# Altium PCB PCB3.PcbDoc
Units mil, origin at the board's own origin, x right, y up, seen from the top; angles counter-clockwise.
Board outline 8700 x 3665 mil, 2 copper layers (Top Layer, Bottom Layer); 67 components, 85 nets, 229 pads, 37 vias.
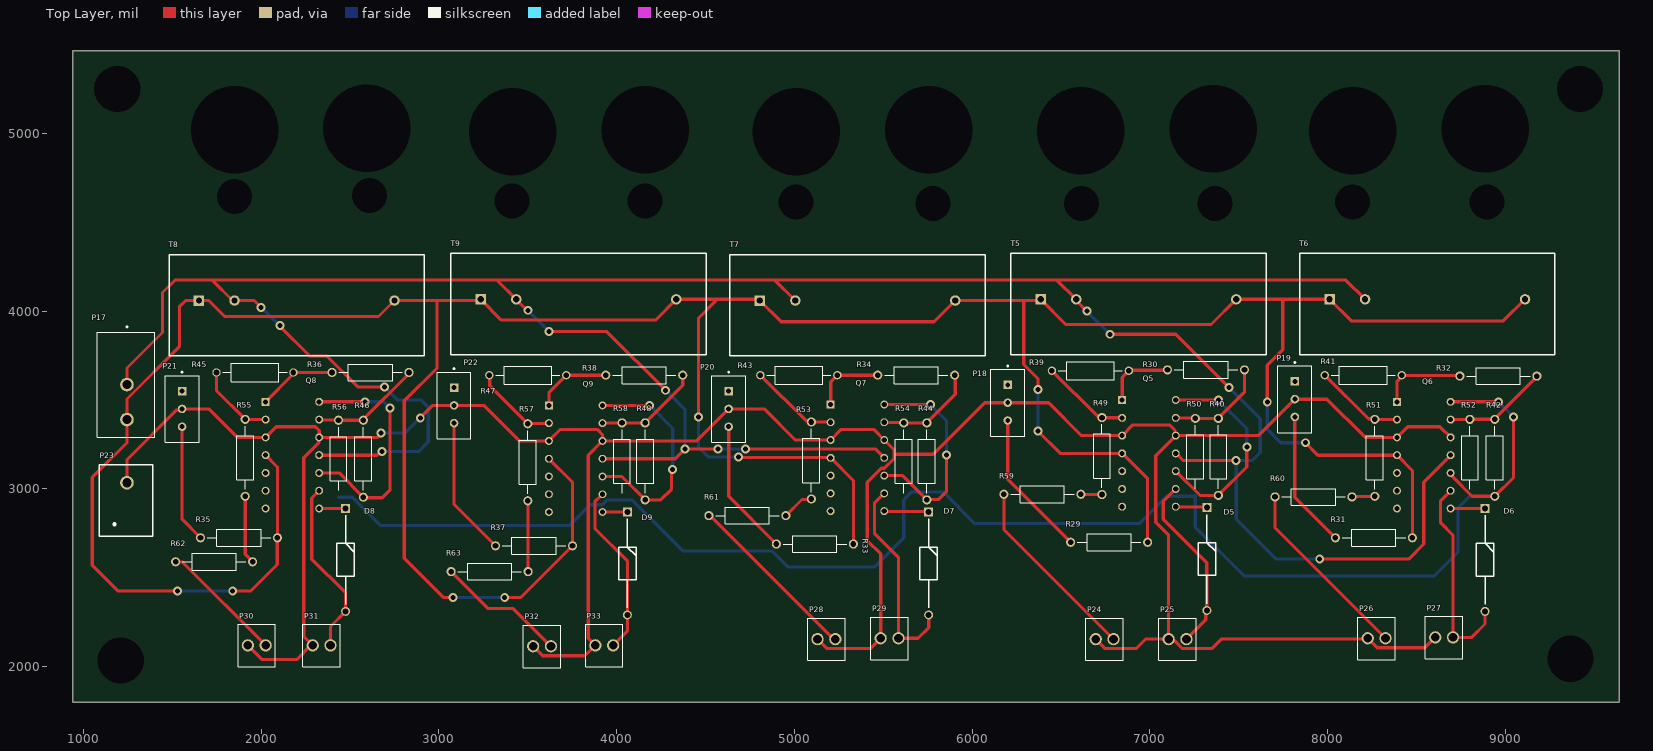
[diagram p0: Top Layer view]
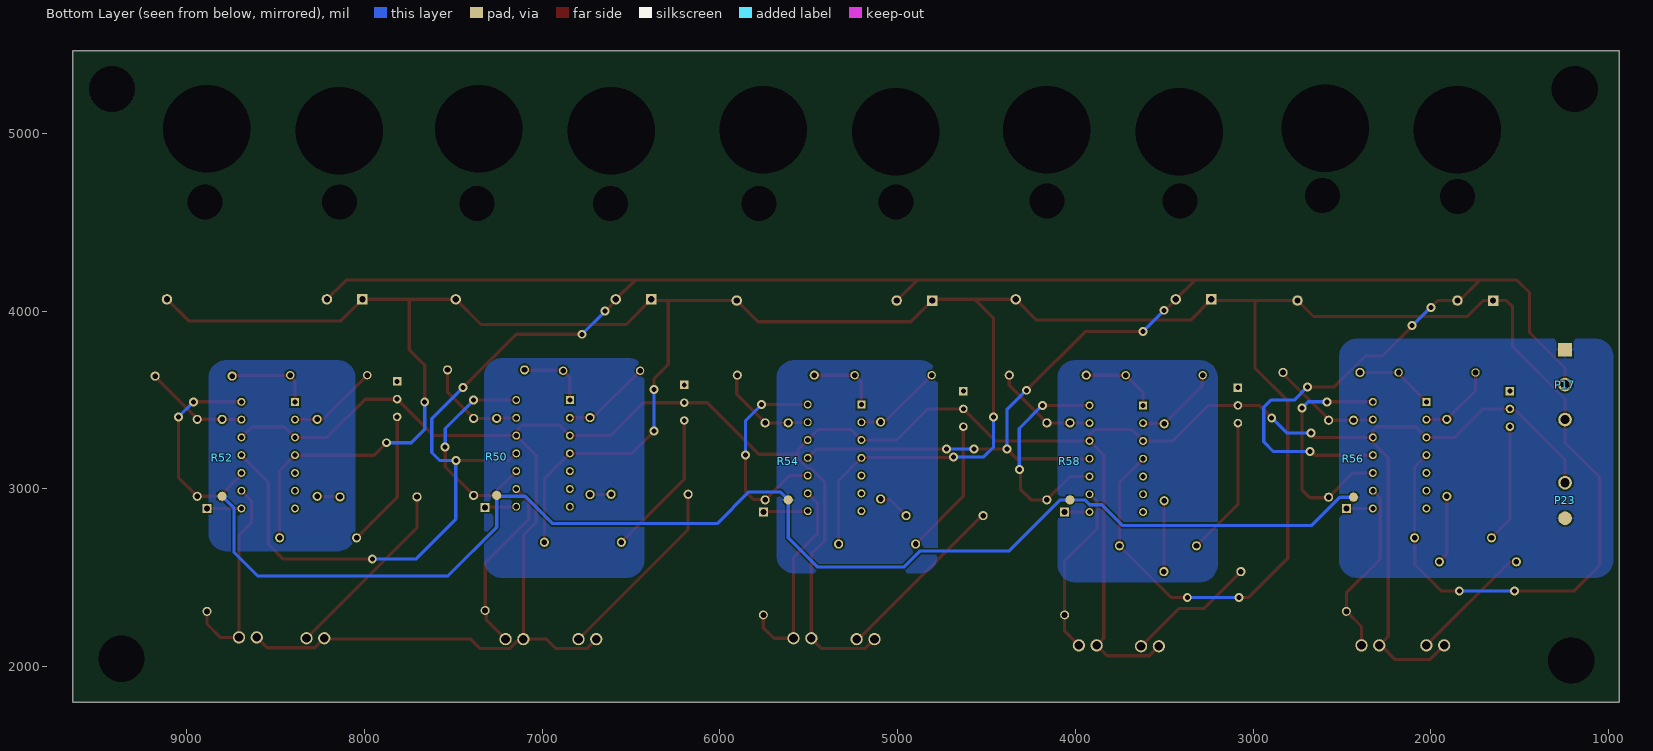
[diagram p1: Bottom Layer view, seen from below]
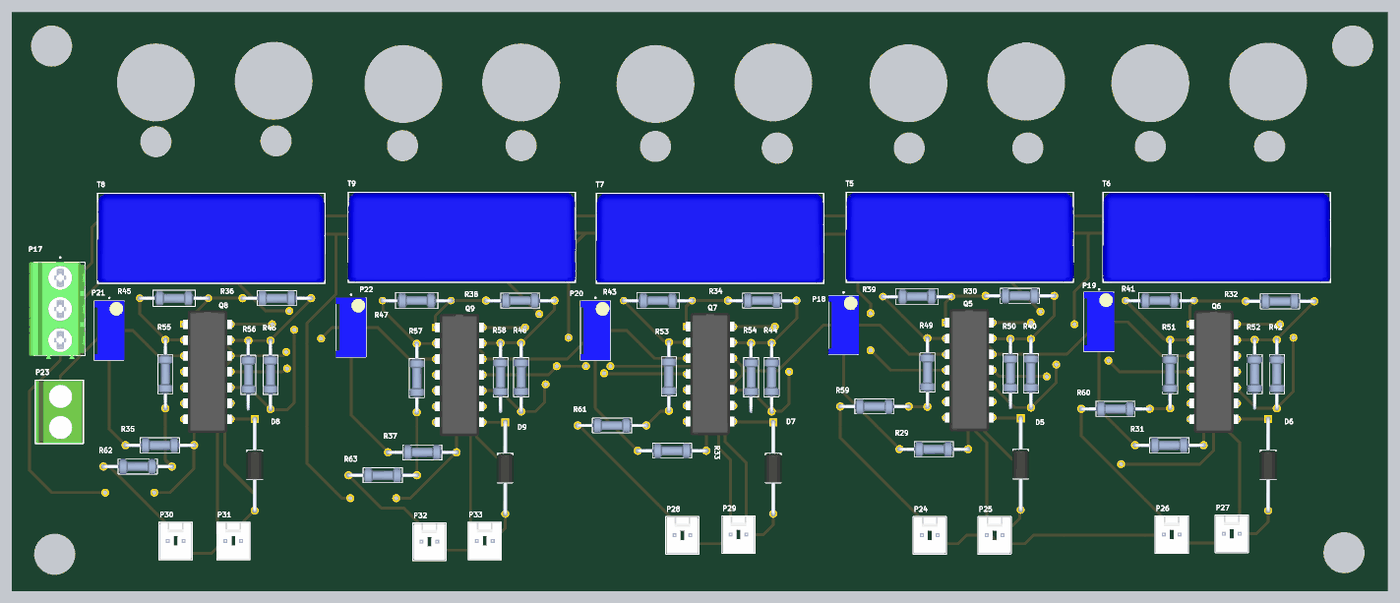
[diagram p2: 3D render of the assembled board from above, using the file's embedded part models]

## Layer stack, top to bottom
Top Solder: solder mask 0.4, Solder Resist, Dk 3.5
Top Layer: signal copper 1.4
Dielectric 1: dielectric 12.6, FR-4, Dk 4.8
Bottom Layer: signal copper 1.4
Bottom Solder: solder mask 0.4, Solder Resist, Dk 3.5

## Board outline
940,1800 9640,1800 9640,5465 940,5465

## Design rules (kind name [scope] priority, off if disabled: settings)
Clearance [All] p1: gap=10 ignorepadtopadclearanceinfootprint=FALSE
Height [All] p1: minheight=0 maxheight=1100 prefheight=500
HoleSize [All] p1: absolutevalues=TRUE maxlimit=500 minlimit=1 maxpercent=80.000 minpercent=20.000
PolygonConnect [All] p1: connectstyle=Relief reliefconductorwidth=10 reliefentries=4 polygonreliefangle="90 Angle" airgapwidth=10
RoutingVias [All] p1: holewidth=28 width=50 viastyle="Through Hole" minholewidth=28 minwidth=50 maxholewidth=28 maxwidth=50
SilkToSolderMaskClearance [IsPad] p1: minsilkscreentomaskgap=9 clearancetoexposedcopper=TRUE
SolderMaskExpansion [All] p1: expansion=0 istentingtop=FALSE
SupplyNets "Schematic Supply Nets_3" [InNet('+15')] p1: voltage=0.000
SupplyNets "Schematic Supply Nets_2" [InNet('+5')] p2: voltage=0.000
SupplyNets "Schematic Supply Nets_1" [InNet('-15')] p3: voltage=0.000
SupplyNets "Schematic Supply Nets" [InNet('GND')] p4: voltage=0.000
Width [All] p1: maxlimit=18 minlimit=18 preferedwidth=18 minimp=50.000000 maximp=50.000000 favimp=50.000000
27 further rules are at their usual default settings.

## Components (designator, comment, footprint, x,y, rotation, side; value= is the part's Value field where it differs from the comment)
D5 "DIODE" Diode 7310,2600 r270 top
D6 "DIODE" Diode 8875,2595 r270 top
D7 "DIODE" Diode 5745,2575 r270 top
D8 "DIODE" Diode 2465,2595 r270 top
D9 "DIODE" Diode 4050,2575 r270 top
P17 "3 PIN JACK" "3 PIN JACK" 1232.68,3587.13 r270 top
P18 "Potentiometer" Potentiometer 6200,3485 r270 top
P19 "Potentiometer" Potentiometer 7815,3505 r270 top
P20 "Potentiometer" Potentiometer 4630,3450 r270 top
P21 "Potentiometer" Potentiometer 1555,3450 r270 top
P22 "Potentiometer" Potentiometer 3085,3470 r270 top
P23 "2 PIN JACK" "2 PIN JACK" 1245,2940 r90 top
P24 "2 Pin" "2 PIN" 6745,2160 r0 top
P25 "2 Pin" "2 PIN" 7155,2160 r0 top
P26 "2 Pin" "2 PIN" 8275,2165 r0 top
P27 "2 Pin" "2 PIN" 8655,2170 r0 top
P28 "2 Pin" "2 PIN" 5180,2160 r0 top
P29 "2 Pin" "2 PIN" 5535,2165 r0 top
P30 "2 Pin" "2 PIN" 1975,2125 r0 top
P31 "2 Pin" "2 PIN" 2340,2125 r0 top
P32 "2 Pin" "2 PIN" 3580,2120 r0 top
P33 "2 Pin" "2 PIN" 3930,2125 r0 top
Q5 "TL084CN" TL084CN 6995,3225 r0 top
Q6 "TL084CN" TL084CN 8541.3,3215 r0 top
Q7 "TL084CN" TL084CN 5355,3200 r0 top
Q8 "TL084CN" TL084CN 2176.3,3215 r0 top
Q9 "TL084CN" TL084CN 3770,3195 r0 top
R29 "47" 47 6755,2700 r0 top
R30 "7.9K" 7.90K#1 7320,3675 r0 top
R31 "47" 47 8245,2725 r0 top
R32 "7.9K" 7.90K#1 8965,3640 r0 top
R33 "47" 47 5100,2690 r0 top
R34 "7.9K" 7.90K#1 5690,3645 r0 top
R35 "47" 47 1860,2725 r0 top
R36 "7.9K" 7.90K#1 2620,3660 r0 top
R37 "47" 47 3520,2680 r0 top
R38 "7.9K" 7.90K#1 4160,3645 r0 top
R39 "3.48K" 3.48K 6660,3680 r180 top
R40 "9.94K" 9.94K 7385,3190 r90 top
R41 "3.48K" 3.48K 8195,3655 r180 top
R42 "9.94K" 9.94K 8940,3185 r90 top
R43 "3.48K" 3.48K 5020,3655 r180 top
R44 "9.94K" 9.94K 5745,3165 r90 top
R45 "3.48K" 3.48K 1960,3670 r180 top
R46 "9.94K" 9.94K 2575,3180 r90 top
R47 "3.48K" 3.48K 3495,3655 r180 top
R48 "9.94K" 9.94K 4160,3165 r90 top
R49 "0.97K" 0.97K 6725,3205 r90 top
R50 "7.9K" 7.90K#2 7250,3185 r90 top
R51 "0.97K" 0.97K 8260,3195 r90 top
R52 "7.9K" 7.90K#2 8795,3180 r90 top
R53 "0.97K" 0.97K 5090,3180 r90 top
R54 "7.9K" 7.90K#2 5610,3160 r90 top
R55 "0.97K" 0.97K 1905,3195 r90 top
R56 "7.9K" 7.90K#2 2430,3175 r90 top
R57 "0.97K" 0.97K 3495,3170 r90 top
R58 "7.9K" 7.90K#2 4025,3160 r90 top
R59 "8.97K" 8.97K 6395,2975 r180 top
R60 "8.97K" 8.97K 7920,2960 r180 top
R61 "8.97K" 8.97K 4735,2855 r180 top
R62 "8.97K" 8.97K 1735,2595 r180 top
R63 "8.97K" 8.97K 3285,2540 r180 top
T5 "Transducer" Transducer 6890,3990 r0 top
T6 "Transducer" Transducer 8515,3990 r0 top
T7 "Transducer" Transducer 5310,3983.43 r0 top
T8 "Transducer" Transducer 2155,3983.43 r0 top
T9 "Transducer" Transducer 3740,3990 r0 top

## Footprints (in the part's own frame and the unit in brackets; to place one, negate y for a bottom-side part, rotate by r counter-clockwise, add the part's x,y. Pads: shape width x height; smd on the part's side, far side on the other; paste and mask are expansions set on the pad)
0.97K [mil]
  round 51.5 hole 31.5: 1(-236.54,-5) 2(196.54,-5)
  silkscreen extent -198,-52 158,42, body extent -247,-52 207,42, height 94
"2 PIN" [mil]
  round 69 hole 49 mask+4.02: 1(50,-5) 2(-50,-5)
  silkscreen extent -105,-125 105,113, body extent -100,-120 100,108, height 461
"2 PIN JACK" [mm]
  round 1.95 smd far side: 1(-2.667,0)
  round 1.95 hole 1.3: 2(2.413,0)
  silkscreen extent -5.23,-3.72 4.97,3.98, body extent -5.13,-3.56 4.87,3.94, height 11.5
"3 PIN JACK" [mm]
  rect 1.95x1.95 smd far side: 1(-4.993,0.313)
  round 1.95 hole 1.3: 2(0.007,0.313) 3(5.007,0.313)
  silkscreen extent -8.34,-3.94 7.51,4.31, body extent -7.59,-4.69 8.08,4.31, height 11.55
3.48K [mm]
  round 1.2 hole 0.8: 1(-5.627,0.381) 2(5.373,0.381)
  silkscreen extent -4.71,-0.92 4.45,1.68, body extent -5.9,-0.82 5.65,1.58, height 2.4
7.90K#1 [mil]
  round 51.5 hole 31.5: 1(-221.54,-5) 2(211.54,-5)
  silkscreen extent -183,-52 173,42, body extent -232,-52 222,42, height 94
7.90K#2 [mil]
  round 51.5 smd far side: 1(-221.54,-5)
  round 51.5 hole 31.5: 2(211.54,-5)
  silkscreen extent -183,-52 173,42, body extent -232,-52 222,42, height 94
8.97K [mm]
  round 1.308 hole 0.8: 1(-5.5,0.127) 2(5.5,0.127)
  silkscreen extent -4.53,-1.07 4.53,1.33, body extent -5.77,-1.07 5.77,1.33, height 2.4
9.94K [mm]
  round 1.308 hole 0.8: 1(-5.754,0) 2(5.246,0)
  silkscreen extent -4.78,-1.2 4.27,1.2, body extent -6.03,-1.2 5.52,1.2, height 2.4
47 [mm]
  round 1.308 hole 0.8: 1(-5.119,0) 2(5.881,0)
  silkscreen extent -4.15,-1.2 4.91,1.2, body extent -5.39,-1.2 6.16,1.2, height 2.4
Diode [mm]
  rect 1.275x1.275 / inner round 1.275 / far side rect 1.275x1.275 hole 0.85: 1(-7.493,0.254)
  round 1.275 hole 0.85: 2(7.207,0.254)
  silkscreen extent -6.51,-1 6.22,1.5, body extent -7.82,-1.09 7.53,1.59, height 2.7
Potentiometer [mm]
  rect 1.218x1.218 / inner round 1.218 / far side rect 1.218x1.218 hole 0.71: 1(-2.54,0)
  round 1.218 hole 0.71: 2(0,0) 3(2.54,0)
  silkscreen extent -5.35,-2.41 4.76,2.42, body extent -4.76,-2.41 4.76,2.42, height 11.55
TL084CN [mm]
  rect 1.13x1.13 / inner round 1.13 / far side rect 1.13x1.13 hole 0.73: 1(-3.843,6.985)
  round 1.13 hole 0.73: 2(-3.843,4.445) 3(-3.843,1.905) 4(-3.843,-0.635) 5(-3.843,-3.175) 6(-3.843,-5.715) 7(-3.843,-8.255) 8(3.81,-8.255) 9(3.81,-5.715) 10(3.81,-3.175) 11(3.81,-0.635) 12(3.81,1.905) 13(3.81,4.445) 14(3.81,6.985)
  body extent -3.94,-10.48 3.94,9.21, height 5.82
Transducer [mm]
  rect 1.5x1.5 / inner round 1.5 / far side rect 1.5x1.5 hole 0.9: 1(-12.827,1.945)
  round 1.5 hole 0.9: 2(-7.747,1.945) 3(15.113,1.945)
  silkscreen extent -17.11,-5.95 19.39,8.49, body extent -17.16,-5.91 19.44,8.44, height 27.2

## Part data
D5 D6 D7 D8 D9: "1N4007S"
P24 P25 P26 P27 P28 P29 P30 P31 P32 P33: "22272021"
R29 R31 R33 R35 R37: "MFR-25FRF52-47R"
R30 R32 R34 R36 R38 R50 R52 R54 R56 R58: "MFR-25FBF52-7K87"
R39 R41 R43 R45 R47: "MFR-25FBF52-3K48"
R40 R42 R44 R46 R48: "MFR-25FTE52-9K76"
R49 R51 R53 R55 R57: "MFR-25FRF52-976R"
R59 R60 R61 R62 R63: "MFR-25FBF52-8K87"
T5 T6 T7 T8 T9: "LA55-P"

## Free pads (board coordinates)
  round 60 hole 492.13: 1(1850,5020) 1(2595,5030) 1(3415,5010) 1(4160,5020) 1(5010,5010) 1(5755,5020) 1(6610,5015) 1(7355,5025) 1(8140,5015) 1(8885,5025)
  round 60 hole 259.84: 3(1190,5250) 3(1210,2035) 3(9365,2045) 3(9420,5250)
  round 60 hole 196.85: 4(1850,4645) 4(2610,4650) 4(3410,4620) 4(4160,4620) 4(5010,4615) 4(5780,4605) 4(6615,4605) 4(7365,4605) 4(8140,4615) 4(8895,4615)

## Via types
v1: diameter 50, hole 28, Top Layer to Bottom Layer, 37 vias

## Nets (pads, with @x,y where several pads share a name; then routed paths per layer and width w, separated by ;. In a path a pad name is that pad's centre, name@x,y a point inside that pad or via, vN(x,y) a via of type N, cw(c..) or ccw(c..) an arc to the next point about the centre after c; other vN are vias at no path point)
+5: P18.2 P19.2 P20.2 P21.2 P22.2 P23.2 P24.2 P25.2 P26.2 P27.2 P28.2 P29.2 P30.2 P31.2 P32.2 P33.2 Q5.3 Q5.12 Q6.3 Q6.12 Q7.3 Q7.12 Q8.3 Q8.12 Q9.3 Q9.12 | length 16847.8
  Top Layer w18: P23.2 1245,3165 1524.45,3444.45 1549.45,3444.45 P21.2 1705,3450 1865,3290 Q8.3 2085,3350 2305,3350 2326.3,3328.7 Q8.12 ; P30.2 2005,2040 2200,2040 2280,2120 P31.2 ; P31.2@2285,2125 2240,2170 2240,3175 2323.83,3258.83 2323.83,3287.53 Q8.12 ; v1@2675,3310 2655,3290 Q8.12 ; v1(2895,3400) 2965,3470 P22.2 3252.32,3470 3452.32,3270 Q9.3 3683.7,3335 3890,3335 3920,3305 Q9.12 ; P32.2 3583.5,2061.5 3821.5,2061.5 P33.2 3840,2160 3840,3190 Q9.12 ; P28.2 5183.5,2101.5 5426.5,2101.5 P29.2 5485,2634.4 5410,2709.4 5410,3038.33 5487.92,3116.24 5506.24,3116.24 5560,3170 5560,3195 ; P24.2 6748.5,2101.5 6921.5,2101.5 6975,2155 P25.2 ; P27.2 8546.5,2106.5 8278.5,2106.5 P26.2 8220,2155 7400,2155 7346.5,2101.5 7182.84,2101.5 7139.1,2145.24 7114.76,2145.24 P25.2 ; Q6.12 8631.3,3350 8450,3350 Q6.3 8210.47,3290 7995.47,3505 P19.2 7610,3300 Q5.12 ; Q9.12 4450,3270 P20.2 4829.82,3450 5004.82,3275 Q7.3 5263.7,3335 5445,3335 Q7.12 5560,3220 5560,3195 ; 5560,3195 5780,3195 6070,3485 P18.2 6429.82,3485 6614.82,3300 Q5.3 6903.7,3360 7110,3360 7140.68,3329.32 7140.68,3304.32 Q5.12 ; P25.2 7105,2740 7032.46,2812.54 7032.46,3187.46 Q5.12
  Bottom Layer w18: v1(2675,3315) 2810,3315 v1(2895,3400)
+15: P17.3 Q5.4 Q6.4 Q7.4 Q8.4 Q9.4 R29.2 R31.2 R33.2 R35.2 R37.2 T5.1 T5.3 T6.1 T6.3 T7.1 T7.3 T8.1 T8.3 T9.1 T9.3 | length 20867.5
  Top Layer w18: v1(1530,2425) 1195,2425 1050,2570 1050,3065 1245,3260 P17.3 1245,3505.69 1540,3800.69 1540,4025 1575,4060 T8.1 1705,4060 1795,3970 2660,3970 T8.3 2989.21,4060 ; v1(1840,2425) 1940,2425 2090,2575 2090,2723.46 R35.2 2091.54,3123.46 Q8.4 ; v1(3080,2390) 3025,2390 2805,2610 2805,3495 2989.21,3679.21 2989.21,4060 ; v1(3370,2390) 3461.54,2390 R37.2 3751.54,3037.17 Q9.4 ; v1(4460,3405) 4460,3959.86 4566.71,4066.57 ; v1(4685,3180) 4687.5,3177.5 5201.2,3177.5 Q7.4 5331.54,3047.17 R33.2 ; v1(6370,3325) 6495,3200 Q5.4 6986.54,3057.17 R29.2 ; v1(6370,3560) 6370,3620 6290,3700 6290,4060 ; v1(7660,3490) 7660,3695 7747.5,3782.5 7747.5,4066.57 ; v1(7875,3260) 7945,3190 Q6.4 8476.54,3103.46 R31.2 ; T6.3 8988.43,3945 8131.57,3945 T6.1 7747.5,4066.57 ; 2989.21,4060 3228.43,4060 T9.1 3351.57,3950 4218.43,3950 T9.3 4566.71,4066.57 ; 4566.71,4066.57 4798.43,4066.57 T7.1 4925,3940 5785,3940 T7.3 6290,4060 ; 6290,4060 6378.43,4060 T5.1 6526.57,3925 7343.43,3925 T5.3 7747.5,4066.57
  Bottom Layer w18: v1(1530,2425) v1(1840,2425) ; v1(3080,2390) v1(3370,2390) ; v1(4460,3405) 4460,3235 4515,3180 v1(4685,3180) ; v1(6370,3325) v1(6370,3560) ; v1(7660,3490) 7660,3335 7735,3260 v1(7875,3260)
-15: P17.2 Q5.11 Q6.11 Q7.11 Q8.11 Q9.11 T5.2 T6.2 T7.2 T8.2 T9.2 | length 17402
  Top Layer w18: P17.2 1245,3680.06 1445,3880.06 1445,4105 1515,4175 1723.89,4175 ; v1(2000,4020) 1960,4060 T8.2 1838.89,4060 1723.89,4175 ; v1(2105,3920) 2105,3915 2272.19,3747.81 2368.94,3747.81 2542.87,3573.88 v1(2694.15,3573.88) ; Q8.11 2651.34,3190 2671.34,3210 v1(2680,3210) ; v1@3490,4010 3435,4065 T9.2 3326.57,4175 ; v1(3620,3885) 3945,3885 v1(4275,3555) ; Q9.11 4330,3170 v1(4385,3225) v1(4570,3225) ; v1(4725,3225) 5455,3225 Q7.11 ; T7.2 4890,4175 ; v1(6645,4000) 6585,4060 T5.2 6476.57,4175 ; v1(6775,3870) 7145,3870 v1(7445,3570) ; Q5.11 7146.89,3200 7186.89,3160 v1(7485,3160) ; v1(7955,2605) 8455,2605 8540,2690 8540,3038.7 Q6.11 ; T6.2 8101.57,4175 6476.57,4175 ; 1723.89,4175 3326.57,4175 ; 3326.57,4175 4890,4175 ; 4890,4175 6476.57,4175
  Bottom Layer w18: v1(2000,4020) 2002.5,4020 2102.5,3920 v1(2105,3920) ; v1(2680,3210) 2885,3210 2940,3265 2940,3459.46 2899.46,3500 2768.03,3500 v1(2694.15,3573.88) ; v1(3500,4005) v1(3620,3885) ; v1(4275,3555) 4385,3445 v1(4385,3225) ; v1(4570,3225) v1(4725,3225) ; v1(6645,4000) v1(6775,3870) ; v1(7445,3570) 7620,3395 7620,3204.97 7575.03,3160 v1(7485,3160) 7485,2830 7710,2605 v1(7955,2605)
GND: P17.1 P23.1 R50.1 R52.1 R54.1 R56.1 R58.1 | length 7710.3
  Bottom Layer w18: R56.1 2511.72,2953.46 2670.18,2795 3735,2795 3851.24,2911.24 3919.57,2911.24 3946.79,2938.46 R58.1 4085.3,2938.46 4373.76,2650 4875.18,2650 4965.18,2560 5450,2560 5615,2725 R54.1 5659.75,2983.21 5763.54,2983.21 5836.79,2983.21 6015,2805 6940,2805 7093.76,2958.76 7250.29,2958.76 R50.1 7255,2785 7530,2510 8600,2510 8732.54,2642.54 8732.54,2891.01 R52.1
NetD1_1: 
NetD1_2: 
NetD2_1: 
NetD2_2: 
NetD3_1: 
NetD3_2: 
NetD4_1: 
NetD4_2: 
NetD5_1: D5.1 Q5.8 | length 177.1
  Top Layer w18: Q5.8 7147.5,2897.5 7317.5,2897.5 D5.1
NetD5_2: D5.2 P25.1 Q5.9 | length 1023.1
  Top Layer w18: Q5.9 7075,2930 7075,2830 7320,2585 D5.2 7314.16,2310.42 7314.16,2264.16 P25.1
NetD6_1: D6.1 Q6.8 | length 193.7
  Top Layer w18: Q6.8 D6.1
NetD6_2: D6.2 P27.1 Q6.9 | length 1159.6
  Top Layer w18: Q6.9 8635,2933.7 8635,2810 8705,2740 P27.1 8810,2165 8885,2240 D6.2
NetD7_1: D7.1 Q7.8 | length 252.1
  Top Layer w18: Q7.8 5507.5,2872.5 5752.5,2872.5 D7.1
NetD7_2: D7.2 P29.1 Q7.9 | length 1159.8
  Top Layer w18: Q7.9 5450,2920 5450,2750 5585,2615 P29.1 5695,2160 5755,2220 D7.2
NetD8_1: D8.1 Q8.8 | length 148.7
  Top Layer w18: Q8.8 D8.1
NetD8_2: D8.2 P31.1 Q8.9 | length 1001
  Top Layer w18: Q8.9 2285.06,2948.76 2285.06,2604.94 2475,2415 D8.2 2390,2226.26 P31.1
NetD9_1: D9.1 Q9.8 | length 140
  Top Layer w18: Q9.8 D9.1
NetD9_2: D9.2 P33.1 Q9.9 | length 976.4
  Top Layer w18: Q9.9 3877.46,2927.46 3877.46,2777.54 4060,2595 D9.2 4060,2200 P33.1
NetP3_1: 
NetP5_3: 
NetP7_3: 
NetP8_3: 
NetP9_3: 
NetP11_1: 
NetP13_1: 
NetP15_1: 
NetP18_3: P18.3 R29.1 | length 831.4
  Top Layer w18: P18.3 6200,3053.46 R29.1
NetP19_3: P19.3 R31.1 | length 774.6
  Top Layer w18: P19.3 7815,2953.46 R31.1
NetP20_3: P20.3 R33.1 | length 771.2
  Top Layer w18: P20.3 4630,2958.46 R33.1
NetP21_3: P21.3 R35.1 | length 667.9
  Top Layer w18: P21.3 1555,2828.46 R35.1
NetP22_3: P22.3 R37.1 | length 786.7
  Top Layer w18: P22.3 3085,2913.46 R37.1
NetP24_1: P24.1 R59.2 | length 1070.4
  Top Layer w18: R59.2 6178.46,2771.54 P24.1
NetP26_1: P26.1 R60.2 | length 1052.4
  Top Layer w18: R60.2 7703.46,2781.54 P26.1
NetP28_1: P28.1 R61.2 | length 999.4
  Top Layer w18: R61.2 4526.73,2850 5221.73,2155 P28.1
NetP30_1: P30.1 R62.2 | length 701.2
  Top Layer w18: R62.2 1519.5,2588.97 1556.03,2588.97 P30.1
NetP32_1: P32.1 R63.2 | length 735.5
  Top Layer w18: R63.2 3276.79,2326.67 3418.33,2326.67 P32.1
NetQ1_1: 
NetQ1_2: 
NetQ1_10: 
NetQ1_13: 
NetQ2_1: 
NetQ2_2: 
NetQ2_10: 
NetQ2_13: 
NetQ3_1: 
NetQ3_2: 
NetQ3_10: 
NetQ3_13: 
NetQ4_1: 
NetQ4_2: 
NetQ4_10: 
NetQ4_13: 
NetQ5_1: Q5.1 R30.1 R39.1 | length 399.7
  Top Layer w18: Q5.1 6843.7,3627.17 6884.04,3667.5 7095.96,3667.5 R30.1
NetQ5_2: Q5.2 R39.2 R49.2 | length 505
  Top Layer w18: R39.2 6705.52,3407.94 6723.59,3407.94 R49.2 6730.77,3400.77 6842.93,3400.77 Q5.2
NetQ5_10: Q5.10 Q5.14 R40.1 | length 1205.6
  Top Layer w18: Q5.10 7281.54,2963.46 R40.1 7545,3123.46 v1(7545,3235) ; Q5.14 v1(7385,3500)
  Bottom Layer w18: v1(7385,3500) 7545,3340 v1(7545,3235)
NetQ5_13: Q5.13 R30.2 R40.2 R50.2 | length 575.6
  Top Layer w18: Q5.13 7146.73,3398.27 7253.27,3398.27 R50.2 R40.2 7531.54,3543.07 R30.2
NetQ6_1: Q6.1 R32.1 R41.1 | length 490
  Top Layer w18: Q6.1 8390,3605.55 8416.54,3632.09 R41.1 8419.04,3637.5 8740.96,3637.5 R32.1
NetQ6_2: Q6.2 R41.2 R51.2 | length 510.1
  Top Layer w18: R41.2 8229.17,3394.3 8262.24,3394.3 8265.77,3390.77 8389.23,3390.77 Q6.2
NetQ6_10: Q6.10 Q6.14 R42.1 | length 1188.7
  Top Layer w18: Q6.10 8691.3,3082.83 8702.47,3071.66 8702.47,3067.53 8811.54,2958.46 R42.1 9045,3063.46 v1(9045,3405) ; Q6.14 v1(8960,3490)
  Bottom Layer w18: v1(8960,3490) v1(9045,3405)
NetQ6_13: Q6.13 R32.2 R42.2 R52.2 | length 590.8
  Top Layer w18: Q6.13 8692.07,3390.77 8799.23,3390.77 R52.2 R42.2 8940,3395 9176.54,3631.54 R32.2
NetQ7_1: Q7.1 R34.1 R43.1 | length 407.6
  Top Layer w18: Q7.1 5203.7,3602.17 R43.1 R34.1
NetQ7_2: Q7.2 R43.2 R53.2 | length 505
  Top Layer w18: R43.2 5065.52,3382.94 5088.59,3382.94 R53.2 5095.77,3375.77 5202.93,3375.77 Q7.2
NetQ7_10: Q7.10 Q7.14 R44.1 | length 1213.1
  Top Layer w18: Q7.10 5608.46,3075 R44.1 5746.54,2940 5810,2940 5855,2985 v1(5855,3190) ; Q7.14 v1(5765,3475)
  Bottom Layer w18: v1(5765,3475) 5855,3385 v1(5855,3190)
NetQ7_13: Q7.13 R34.2 R44.2 R54.2 | length 577.6
  Top Layer w18: Q7.13 5506.73,3373.27 5613.27,3373.27 R54.2 R44.2 5905,3531.54 5905,3636.54 R34.2
NetQ8_1: Q8.1 R36.1 R45.1 | length 446.8
  Top Layer w18: Q8.1 2175.94,3640.94 2175.94,3649.4 R45.1 R36.1
NetQ8_2: Q8.2 R45.2 R55.2 | length 446
  Top Layer w18: R45.2 1748.46,3553.07 R55.2 1910.77,3390.77 2024.23,3390.77 Q8.2
NetQ8_10: Q8.10 Q8.14 R46.1 | length 1348.5
  Top Layer w18: Q8.10 2438.46,3090 R46.1 2578.46,2950 2680,2950 2725,2995 v1(2725,3455) ; Q8.14 v1(2585,3490)
  Bottom Layer w18: v1(2585,3490) 2690,3490 v1(2725,3455)
NetQ8_13: Q8.13 R36.2 R46.2 R56.2 | length 624.9
  Top Layer w18: Q8.13 2328.03,3388.27 2433.27,3388.27 R56.2 R46.2 2575,3392.5 2831.54,3649.04 R36.2
NetQ9_1: Q9.1 R38.1 R47.1 | length 432.5
  Top Layer w18: Q9.1 3618.7,3542.17 R47.1 R38.1
NetQ9_2: Q9.2 R47.2 R57.2 | length 483.3
  Top Layer w18: R47.2 3286.22,3637.24 3286.22,3580.31 R57.2 3501.73,3368.27 3616.97,3368.27 Q9.2
NetQ9_10: Q9.10 Q9.14 R48.1 | length 1260.9
  Top Layer w18: Q9.10 4028.46,3070 R48.1 4248.46,2938.46 4308.88,2998.88 4308.88,3103.88 v1(4315,3110) ; Q9.14 v1(4185,3470)
  Bottom Layer w18: v1(4185,3470) 4315,3340 v1(4315,3110)
NetQ9_13: Q9.13 R38.2 R48.2 R58.2 | length 596.7
  Top Layer w18: Q9.13 3920.77,3370.77 4029.23,3370.77 R58.2 R48.2 4371.54,3583.07 R38.2
NetR3_1: 
NetR20_1: 
NetR22_1: 
NetR24_1: 
NetR49_1: R49.1 R59.1 | length 119.1
  Top Layer w18: R59.1 6612.3,2969.23 6729.23,2969.23 R49.1
NetR51_1: R51.1 R60.1 | length 129.9
  Top Layer w18: R60.1 8138.27,2956.73 8263.27,2956.73 R51.1
NetR53_1: R53.1 R61.1 | length 182.2
  Top Layer w18: R61.1 5042.25,2940.72 5092.25,2940.72 R53.1
NetR55_1: R55.1 R62.1 | length 385.7
  Top Layer w18: R55.1 1910,2631.54 R62.1
NetR57_1: R57.1 R63.1 | length 399.1
  Top Layer w18: R57.1 3500.77,2932.7 3500.77,2535.77 R63.1
pads on no net: P18.1 P19.1 P20.1 P21.1 P22.1 Q5.5 Q5.6 Q5.7 Q6.5 Q6.6 Q6.7 Q7.5 Q7.6 Q7.7 Q8.5 Q8.6 Q8.7 Q9.5 Q9.6 Q9.7

## Polygon pours and split planes (outlines as drawn)
GND on Bottom Layer "GND_L02_P003" (solid, pour order 3): 6425,3650 cw(c6510,3650) 6510,3735 7225,3735 cw(c7225,3635) 7325,3635 7325,2600 cw(c7225,2600) 7225,2500 6525,2500 cw(c6525,2600) 6425,2600
GND on Bottom Layer "GND_L02_P002" (solid, pour order 2): 4775,3625 cw(c4875,3625) 4875,3725 5580,3725 cw(c5580,3625) 5680,3625 5680,2625 cw(c5580,2625) 5580,2525 4875,2525 cw(c4875,2625) 4775,2625
GND on Bottom Layer "GND_L02_P001" (solid, pour order 1): 3200,3625 cw(c3300,3625) 3300,3725 4000,3725 cw(c4000,3625) 4100,3625 4100,2575 cw(c4000,2575) 4000,2475 3300,2475 cw(c3300,2575) 3200,2575
GND on Bottom Layer "GND_L02_P004" (solid, pour order 4): 8050,3625 cw(c8150,3625) 8150,3725 8775,3725 cw(c8775,3625) 8875,3625 8875,2750 cw(c8775,2750) 8775,2650 8150,2650 cw(c8150,2750) 8050,2750
GND on Bottom Layer "GND_L02_P000" (solid, pour order 0): 975,3745 cw(c1075,3745) 1075,3845 2414.86,3845 cw(c2415,3745) 2515,3745 2515,2600 cw(c2415,2600) 2415,2500 1075,2500 cw(c1075,2600) 975,2600 975,2670